# Allegro board PRISON_GOD_SCH_V220_VIAS_REPLACE.brd
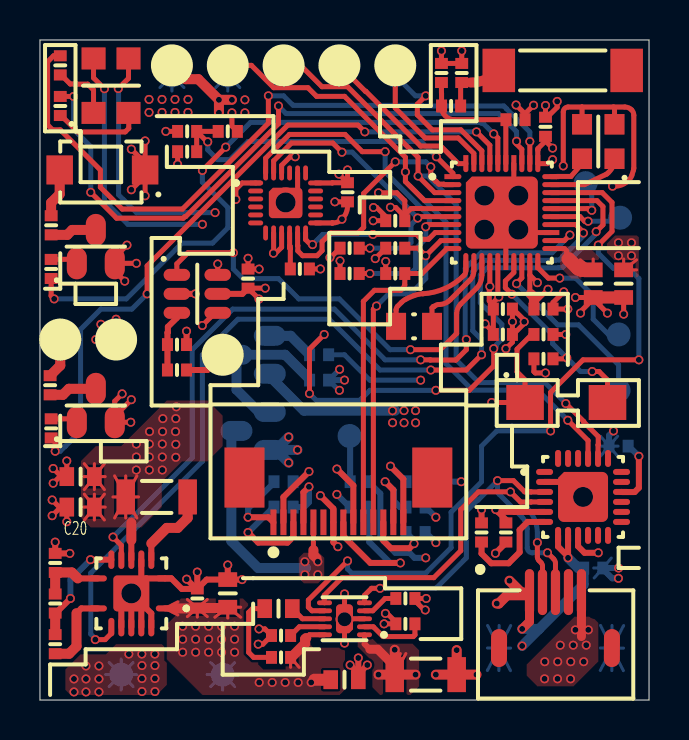
[diagram p0: board, top side]
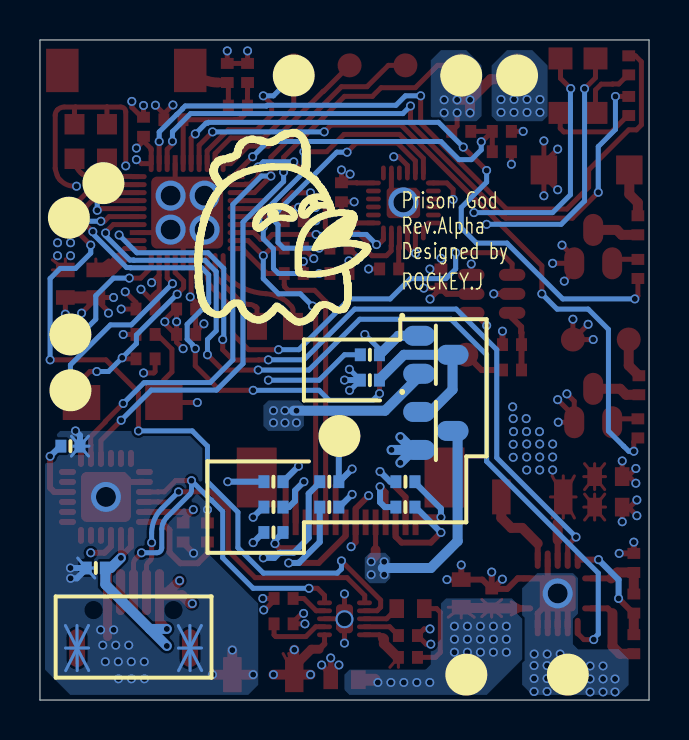
[diagram p1: board, bottom side, seen from below]

Outline 30.48 x 33.02 mm; copper layers: TOP, POWER SOURCE, GND, BOTTOM. Coordinates in mm from the lower left corner of the outline.
Outline path: 0,33.02 30.48,33.02 30.48,0 0,0 0,33.02

## Design rules (mm)
constraint set DEFAULT: min track width 0.152

## Placement (name value [footprint] x y rotation side)
ANT  ANTENNA  [ANT700X200-2N]  26.16 31.5 0 top
BAT+  BAT+  [TESTPOINT120]  9.14 1.27 180 bottom
BAT-  BAT-  [TESTPOINT120]  4.06 1.27 180 bottom
C1  100n  [RESC_0402]  7.37 28.45 0 top
C2  2.2p  [RESC_0402]  20.57 29.72 180 top
C3  100n  [RESC_0402]  25.3 28.68 90 top
C4  1.0u  [RESC_0603]  29.21 20.83 90 top
C5  1.0u  [RESC_0402]  25.2 19.56 180 top
C6  100n  [RESC_0402]  25.2 18.29 0 top
C7  1.0u  [RESC_0402]  23.16 19.56 0 top
C8  100n  [RESC_0402]  23.16 18.29 0 top
C9  100n  [RESC_0402]  17.78 23.98 180 top
C10  0-75p  [RESC_0402]  6.86 17.78 0 top
C11  100n  [RESC_0402]  10.41 21.08 270 top
C12  1u  [RESC_0402]  12.19 10.92 180 bottom
C13  4.7u  [RESC_0402]  18.8 10.92 180 bottom
C14  1u  [RESC_0402]  12.19 9.65 180 bottom
C15  2.2u  [RESC_0402]  18.8 9.65 180 bottom
C16  4.7u  [RESC_0402]  16 9.65 180 bottom
C17  1u  [RESC_0603]  15.24 1.02 0 top
C18  4.7u  [RESC_0603]  9.4 5.33 90 top
C19  0.1u  [RESC_0402]  7.87 5.08 90 top
C20  10u  [RESC_0603]  2.03 9.65 0 top
C21  10u  [RESC_0603]  2.03 11.18 0 top
C22  100n  [RESC_0402]  13 21.56 0 top
C23  10UF  [RESC_1206]  19.3 1.27 180 top
C24  4.7u  [RESC_0402]  28.96 12.7 0 bottom
C25  100n  [RESC_0402]  23.32 8.38 90 top
C26  100n  [RESC_0402]  22.1 8.38 270 top
C27  1.0u  [RESC_0402]  27.69 6.6 180 bottom
C28  100n  [RESC_0402]  15.39 25.4 270 top
CHR_LED  LED  [RESC_0603]  11.94 4.57 180 top
DA_RES  BUTTON  [BUTTON300X400X200-2N]  26.34 14.88 0 top
INTA  INTA  [TESTPOINT120]  28.96 15.49 180 bottom
INTB  INTB  [TESTPOINT120]  28.96 18.29 180 bottom
INTC  INTC  [TESTPOINT120]  17.78 31.75 0 top
INTD  INTD  [TESTPOINT120]  14.99 31.75 0 top
J_GND  GND  [TESTPOINT120]  9.4 31.24 180 bottom
J_VCC  J_VCC  [TESTPOINT120]  6.6 31.24 180 bottom
L1  DNP  [RESC_0402]  21.11 31.37 90 top
L2  7.5n  [RESC_0402]  20.09 31.37 90 top
L3  3.9n  [RESC_0402]  23.8 29.03 0 top
L4  2.2u  [RESC_0603]  27.69 20.83 270 top
L5  4.7u  [RESC_1206]  5.84 10.16 180 top
LED  RED_GREEN  [RGB_COM_A_3528-4N]  3.56 30.73 90 top
NOREF  -  []  0 33.02 0 top
NOREF#2  -  []  30.48 0 90 top
PAD  PAD  [TESTPOINT120]  9.14 17.27 0 top
Q1  SI2302DS  [SOT95P237X112-3N]  2.79 22.68 90 top
Q2  SI2302DS  [SOT95P237X112-3N]  2.79 14.73 90 top
Q3  Si2301BDS  [SOT95P237X112-3N]  10.67 13.46 180 bottom
Q4  SI2302DS  [SOT95P237X112-3N]  10.67 17.27 180 bottom
R1  10k  [RESC_0402]  9.4 28.45 0 top
R2  10k  [RESC_0402]  7.37 27.43 0 top
R3  10k  [RESC_0402]  17.78 21.34 180 top
R4  10k  [RESC_0402]  17.78 22.61 180 top
R5  10k  [RESC_0402]  15.49 22.61 0 top
R6  10k  [RESC_0402]  15.49 21.34 0 top
R7  10k  [RESC_0402]  25.2 17.07 0 top
R8  100  [RESC_0402]  0.56 23.75 270 top
R9  100  [RESC_0402]  0.51 15.75 270 top
R10  100  [RESC_0402]  1.02 31.75 90 top
R11  100  [RESC_0402]  1.02 29.72 90 top
R12  100  [RESC_0402]  0.56 21.56 90 top
R13  100  [RESC_0402]  0.56 13.59 90 top
R14  1-10k  [RESC_0402]  6.86 16.51 180 top
R15  47k  [RESC_0402]  13.97 16 180 bottom
R16  47k  [RESC_0402]  13.97 17.27 180 bottom
R17  10k  [RESC_0402]  16 10.92 180 bottom
R18  560k  [RESC_0402]  18.8 8.38 180 bottom
R19  500  [RESC_0402]  18.29 3.81 0 top
R20  250  [RESC_0402]  18.29 5.08 0 top
R21  10k  [RESC_0402]  12.06 3.23 180 top
R22  1.5k  [RESC_0402]  12.06 2.13 0 top
R23  158k  [RESC_0402]  0.76 2.79 90 top
R24  90k  [RESC_0402]  0.76 6.86 90 top
R25  15k  [RESC_0402]  0.76 4.83 90 top
RES  RES  [TESTPOINT120]  15.49 13.21 180 bottom
RXD  RX  [TESTPOINT120]  9.4 31.75 0 top
SOUNDER  R  [DET402_450X300-2N]  3.12 26.52 180 top
SWCLK  SWCLK  [TESTPOINT120]  27.3 25.86 180 bottom
SWDIO  SWDIO  [TESTPOINT120]  29.03 24.13 180 bottom
TXD  TX  [TESTPOINT120]  12.19 31.75 0 top
U1  DA14583_QFN40  [QFN40P500X500X80-41N]  23.11 24.38 0 top
U2  ASC0111B  [SOT95P237X292-6N]  7.87 20.32 0 top
U3  OLED_DIS_64_32  [FPC14N_1280X670X200-16N]  11.68 8.89 180 top
U4  BQ24050  [SON40P200X200X80-11N]  15.24 4.06 180 top
U5  TPS62736_PVQFN14  [QFN14P350X350X80-15N]  4.57 5.33 180 top
U6  MPU9250  [QFN24P300X300X100-25N]  12.29 24.87 0 top
U7  CP2104_QFN24  [QFN24P400X400X80-25N]  27.18 10.16 0 top
U_GND  GND  [TESTPOINT120]  6.6 31.75 0 top
USB  MICRO USB  [MICROUSB]  22.1 0 0 top
VM+  VM+  [TESTPOINT120]  3.81 18.03 0 top
VM-  VM-  [TESTPOINT120]  1.02 18.03 0 top
VPP  VPP  [TESTPOINT120]  17.78 31.24 180 bottom
Y1  16MHZ  [OSCCC200X250X90-4N]  27.94 27.94 180 top
Y2  32KHZ  [OSCCC200X120X60-2N]  18.72 18.69 0 top

## Library data of the parts
ANT = ANTENNA_0
BAT+ BAT- INTA INTB INTC INTD J_GND J_VCC PAD RES RXD SWCLK SWDIO TXD U_GND VM+ VM- VPP = TEST POINT
C1-C22 C24-C28 = CAP NP
C23 = CAP
CHR_LED = LED
DA_RES = SW PUSHBUTTON
L1-L5 = INDUCTOR
LED = LED BI-COLOUR_0
Q1 Q2 Q4 = MOSFET_I_EN_GSD: room: motor
Q3 = Si2301BDS_0
R1-R25 SOUNDER = R
U1 = DA14583_QFN40
U2 = ASC0111B_0
U3 = OLED_DIS_64_0
U4 = BQ24050
U5 = TPS62736_PVQFN14_2
U6 = MPU9250_1
U7 = CP2104_QFN24_0
USB = MICROUSB_1
Y1 = CRYSTAL14
Y2 = CRYSTAL

## Footprints (pads in the part's own frame, mm; a bottom-side part is the same pattern mirrored in y, then rotated)
ANT700X200-2N
  rect 1.625x2.17 smd: 1(-3.2,0) 2(3.2,0)
BUTTON300X400X200-2N
  rect 1.875x1.75 smd: 1(-2.062,0) 2(2.062,0)
DET402_450X300-2N
  rect 1.325x1.45 smd: 1(-2.138,0) 2(2.138,0)
FPC14N_1280X670X200-16N
  rect 0.3x1.28 smd: 1(0,0) 2(-0.5,0) 3(-1,0) 4(-1.5,0) 5(-2,0) 6(-2.5,0) 7(-3,0) 8(-3.5,0) 9(-4,0) 10(-4.5,0) 11(-5,0) 12(-5.5,0) 13(-6,0) 14(-6.5,0)
  rect 2x3 smd: M1(-7.95,-2.24) M2(1.45,-2.24)
MICROUSB
  round 0 hole 0.6: (1.7,4.5) (5.7,4.5)
  oval 0.46x2.3 smd: 1(2.4,5.4) 2(3.05,5.4) 3(3.7,5.4) 4(4.35,5.4) 5(5,5.4)
  oval 1.9x0.8 smd rot 89.7: 6(6.525,2.6) 7(0.875,2.6)
OSCCC200X120X60-2N
  rect 1x1.35 smd: 1(-0.9,0) 2(0.9,0)
OSCCC200X250X90-4N
  rect 1x1.025 smd: 1(-0.812,0.863) 2(-0.812,-0.863) 3(0.812,-0.863) 4(0.812,0.863)
QFN14P350X350X80-15N
  oval 0.925x0.3 smd: 1(-1.688,0.75) 7(1.688,0.75) 8(1.688,-0.75) 14(-1.688,-0.75)
  oval 0.3x0.925 smd: 2(-1,1.688) 3(-0.5,1.688) 4(0,1.688) 5(0.5,1.688) 6(1,1.688) 9(1,-1.688) 10(0.5,-1.688) 11(0,-1.688) 12(-0.5,-1.688) 13(-1,-1.688)
  custom 1.8x1.8 smd: 15(0,0)
QFN24P300X300X100-25N
  oval 0.75x0.238 smd: 1(-1.5,1) 2(-1.5,0.6) 3(-1.5,0.2) 4(-1.5,-0.2) 5(-1.5,-0.6) 6(-1.5,-1) 13(1.5,-1) 14(1.5,-0.6) 15(1.5,-0.2) 16(1.5,0.2) 17(1.5,0.6) 18(1.5,1)
  oval 0.238x0.75 smd: 7(-1,-1.5) 8(-0.6,-1.5) 9(-0.2,-1.5) 10(0.2,-1.5) 11(0.6,-1.5) 12(1,-1.5) 19(1,1.5) 20(0.6,1.5) 21(0.2,1.5) 22(-0.2,1.5) 23(-0.6,1.5) 24(-1,1.5)
  custom 1.68x1.52 smd: 25(0,0)
QFN24P400X400X80-25N
  oval 0.85x0.3 smd: 1(-1.925,1.25) 2(-1.925,0.75) 3(-1.925,0.25) 4(-1.925,-0.25) 5(-1.925,-0.75) 6(-1.925,-1.25) 13(1.925,-1.25) 14(1.925,-0.75) 15(1.925,-0.25) 16(1.925,0.25) 17(1.925,0.75) 18(1.925,1.25)
  oval 0.3x0.85 smd: 7(-1.25,-1.925) 8(-0.75,-1.925) 9(-0.25,-1.925) 10(0.25,-1.925) 11(0.75,-1.925) 12(1.25,-1.925) 19(1.25,1.925) 20(0.75,1.925) 21(0.25,1.925) 22(-0.25,1.925) 23(-0.75,1.925) 24(-1.25,1.925)
  custom 2.5x2.5 smd: 25(0,0)
QFN40P500X500X80-41N
  custom 0.85x0.25 smd: 1(-2.45,1.8) 2(-2.45,1.4) 3(-2.45,1) 4(-2.45,0.6) 5(-2.45,0.2) 6(-2.45,-0.2) 7(-2.45,-0.6) 8(-2.45,-1) 9(-2.45,-1.4) 10(-2.45,-1.8) 21(2.45,-1.8) 22(2.45,-1.4) 23(2.45,-1) 24(2.45,-0.6) 25(2.45,-0.2) 26(2.45,0.2) 27(2.45,0.6) 28(2.45,1) 29(2.45,1.4) 30(2.45,1.8)
  custom 0.25x0.85 smd: 11(-1.8,-2.45) 12(-1.4,-2.45) 13(-1,-2.45) 14(-0.6,-2.45) 15(-0.2,-2.45) 16(0.2,-2.45) 17(0.6,-2.45) 18(1,-2.45) 19(1.4,-2.45) 20(1.8,-2.45) 31(1.8,2.45) 32(1.4,2.45) 33(1,2.45) 34(0.6,2.45) 35(0.2,2.45) 36(-0.2,2.45) 37(-0.6,2.45) 38(-1,2.45) 39(-1.4,2.45) 40(-1.8,2.45)
  custom 3.6x3.6 smd: 41(0,0)
RESC_0402
  rect 0.55x0.64 smd: 1(-0.477,0) 2(0.477,0)
RESC_0603
  rect 0.73x0.94 smd: 1(-0.69,0) 2(0.69,0)
RESC_1206
  rect 0.925x1.75 smd: 1(-1.55,0) 2(1.55,0)
RGB_COM_A_3528-4N
  rect 1.1x1.2 smd: 1(-1.363,0.875) 2(-1.363,-0.875) 3(1.363,-0.875) 4(1.363,0.875)
SON40P200X200X80-11N
  oval 0.75x0.24 smd: 1(-1,0.8) 2(-1,0.4) 3(-1,0) 4(-1,-0.4) 5(-1,-0.8) 6(1,-0.8) 7(1,-0.4) 8(1,0) 9(1,0.4) 10(1,0.8)
  custom 0.85x1.45 smd: 11(0,0)
SOT95P237X112-3N
  oval 1.6x1 smd: 1(-0.835,0.95) 2(-0.835,-0.95) 3(0.835,0)
SOT95P237X292-6N
  oval 1.325x0.6 smd: 1(-1.022,0.95) 2(-1.022,0) 3(-1.022,-0.95) 4(1.022,-0.95) 5(1.022,0) 6(1.022,0.95)
TESTPOINT120
  round 1.2 smd: 1(0,0)

## Nets
GND: BAT-.1 C1.1 C3.2 C4.2 C5.1 C6.2 C7.2 C8.2 C9.2 C10.2 C11.1 C13.1 C15.1 C16.2 C17.2 C18.2 C19.2 C20.1 C21.1 C22.2 C23.1 C24.1 C25.1 C26.1 C27.1 C28.1 J_GND.1 L1.2 L2.2 L3.2 Q1.2(S) Q2.2(S) Q4.2(S) R1.2 R7.1 R16.1 R18.1 R19.1 R20.2 R21.2 R24.2 U1.16 U1.23 U1.34 U1.41 U2.2 U2.4 U2.6 U3.7(VSS) U4.3(VSS) U4.11 U5.2 U5.3 U5.4 U5.5 U5.12(VSS) U5.14 U5.15 U6.18 U6.20 U6.25 U7.2 U7.25 U_GND.1 USB.5 USB.6 USB.7 Y1.2 Y1.3
VBAT: BAT+.1 C17.1 C18.1 C19.1 J_VCC.1 Q3.2(S) R2.1 R15.1 R22.2 SOUNDER.1 U4.10 U5.1 VM+.1
VBAT_AD: C1.2 R1.1 R2.2 U1.1
VBUS: C23.2 C27.2 U4.1 U7.7 U7.8 USB.1(VBUS)
VCC_3V: C6.1 C7.1 C8.1 C9.1 C11.2 C16.1 C20.2 C21.2 C25.2 C28.2 DA_RES.1 L5.2 LED.3 LED.4 R3.2 R4.2 R5.1 R6.1 R17.1 U1.5 U1.14 U1.15 U2.5(VDD) U3.8 U5.11 U6.1 U6.8(VDDIO) U6.9 U6.13 U6.22 U7.5 U7.9
VIN_OK: U1.22 U5.10
VIN_OK_SET: U1.24 U5.6
CHR_SET: U1.28 U4.7
D+: U4.5 U7.3 USB.3
D-: U4.6 U7.4 USB.2
DA_RST: DA_RES.2 R7.2 U1.17
I2C_SCL_1: R4.1 U1.9 U3.11
I2C_SCL_2: R5.2 U1.6 U6.23
I2C_SDA_1: R3.1 U1.10 U3.10
I2C_SDA_2: R6.2 U1.7 U6.24
INTA: INTA.1 U1.18
INTB: INTB.1 U1.20
INTC: INTC.1 U1.39
INTD: INTD.1 U1.40
LED1: R10.2 U1.32
LED2: R11.2 U1.33
MOTOR: R13.1 U1.37
MPU_FSYNC: U1.2 U6.11
MPU_INT: U1.8 U6.12
OLED_RES: R17.2 RES.1 U3.9
OLED_VBAT: Q3.3 U3.5
OLED_VBAT_SW: Q4.1 R16.2 U1.27
SOUNDER: R12.1 U1.36
SWCLK: SWCLK.1 U1.26
SWDIO: SWDIO.1 U1.25
TOUCH: U1.13 U2.1
UART_RX: RXD.1 U1.4 U7.21
UART_TX: TXD.1 U1.3 U7.20
VDCDC: C3.1 C4.1 C5.2 L4.2 U1.19 U1.31
VPP: U1.38 VPP.1
N650552: C2.2 L2.1 L3.1 U1.35
N650846: L4.1 U1.21
N657737: U1.11 Y2.1
N657743: U1.12(XTAL32KP) Y2.2
N658494: U1.29 Y1.1
N680797: ANT.1 C2.1 L1.1
N748992: R19.2 U4.2
N749044: R20.1 U4.4
N749072: R21.1 U4.9
N749104: CHR_LED.1(CATHODE) U4.8
N749108: CHR_LED.2 R22.1
N749358: L5.1 U5.13
N749416: R24.1 R25.2 U5.8
N749488: R23.2 R25.1 U5.9
N750591: C22.1 U6.10
N751124: R8.1 SOUNDER.2
N751136: R9.1 VM-.1
N751236: Q1.3 R8.2
N751248: Q2.3 R9.2
N751256: Q1.1 R12.2
N751260: Q2.1 R13.2
N752175: C12.2 U3.1
N752329: Q3.1 Q4.3 R15.2
N752341: C12.1 U3.2
N752385: C14.2 U3.3
N752391: C14.1 U3.4
N752429: R18.2 U3.12
N752435: C15.2 U3.13
N752441: C13.2 U3.14
N753230: LED.1 R10.1
N753234: LED.2(YG_C) R11.1
N753932: C24.2 U7.16(VPP)
N754493: C10.1 R14.2 U2.3
N766501: PAD.1 R14.1
N768010: C26.2 U7.6
N788503: U1.30 Y1.4
N7492626: R23.1 U5.7

Pads without a net: ANT 2; U3 6 M1 M2; U6 2 3 4 5 6 7 14 15 16 17 19 21; U7 1 10 11 12 13 14 15 17 18 19 22 23 24; USB 4

## Via types
v1: diameter 0.45, hole 0.3, TOP to BOTTOM, 295 vias
v2: diameter 1.5, hole 1, TOP to BOTTOM, 7 vias
v3: diameter 0.9, hole 0.7, TOP to BOTTOM, 1 via

## Routing (per net, layer and track width the routed paths; a pad name or vN(x,y) marks a point on that pad's centre or on a via; arc(x,y) is an arc through that point)
GND: length 159.6
  TOP w0.152: C4.2 29.86,21.52 ; C4.2 29.86,22.02 ; C4.2 29.21,22.06
  TOP w0.25: U4.3 15.27,4.06 v3(15.24,4.04) ; v1(4.24,20.95) 3.74,21.45 Q1.2 ; 28.7,29.67 29.26,29.67 arc(29.45,29.63) 29.61,29.52 arc(29.69,29.4) 29.72,29.26 29.72,26.61 arc(29.72,26.57) 29.71,26.53 29.62,26.24 arc(29.57,26.14) 29.5,26.05 29.44,25.98 arc(29.13,25.78) 28.76,25.7 v1(28.65,25.7) ; 28.7,29.67 28.75,29.62 Y1.2 ; 28.7,29.67 27.13,29.67 ; v1(23.32,17.58) 23.64,17.9 C8.2 ; 1.04,9.65 C20.1 v1(1.34,8.92) ; 1.04,9.65 v1(0.61,9.22) ; 1.04,9.65 0.97,9.65 v1(0.61,10.01) ; C6.2 v1(26.31,18.29) ; C8.2 23.68,18.29 24.23,18.84 v1(24.23,18.92) 24.23,19.01 23.68,19.56 C7.2 ; C8.2 23.62,18.27 ; C8.2 v1(23.64,18.92) C7.2 ; C8.2 23.62,18.31 ; v1(25.3,29.74) C3.2 25.38,29.15 25.88,29.65 v1(25.88,29.95) ; U6.25 12.89,25.47 U6.20 ; v1(26.19,26.72) 26.19,29.42 arc(26.26,29.59) 26.44,29.67 27.13,29.67 ; v1(4.11,15.32) 3.74,14.95 3.74,14.2 ; 24.28,29.32 v1(23.83,29.77) ; 24.28,29.32 L3.2 ; 24.28,29.32 24.28,29.33 v1(24.7,29.76) ; v1(20.09,32.47) L2.2 L1.2 v1(21.11,32.47) ; U2.6 v1(8.9,21.81) ; v1(8.12,18.74) 8.76,19.37 U2.4 ; 3.74,14.2 v1(4.57,15.03) ; 3.74,14.2 Q2.2 v1(4.54,13.9) ; v3(15.24,4.04) v1(15.24,5.31) ; v3(15.24,4.04) v1(15.24,2.85) ; C7.2 23.62,19.54 ; C7.2 23.62,19.58 ; U1.34 23.71,24.98 U1.41 23.31,24.18 ; 1.07,11.18 v1(0.66,11.58) ; 1.07,11.18 C21.1 v1(1.34,11.96) ; 1.07,11.18 0.99,11.18 v1(0.66,10.85) ; v1(10.92,2.79) 11.16,2.79 R21.2 11.26,3.56 v1(10.96,3.56) ; v1(16.68,23.98) C9.2 17.3,24.19 16.85,24.64 v1(16.69,24.64) ; v1(19.28,4.5) 19.23,4.5 18.77,4.97 R20.2 v1(19.33,5.08) ; C1.1 v1(6.3,28.45) ; R7.1 24.72,16.43 24.79,16.36 v1(25.3,16.36) ; v1(17.22,3.81) R19.1 17.81,3.9 17.37,4.33 v1(17.29,4.33) ; v1(10.97,21.56) C11.1 v1(10.41,22.1) ; U1.16 23.31,24.18 ; 23.31,24.18 24.11,23.38 U1.23 ; C28.1 14.63,25.88 14.62,25.87 U6.18 ; C28.1 v1(14.96,26.31) ; C28.1 v1(15.39,26.52) ; Q1.2 v1(4.83,21.85) ; Q1.2 3.74,22.15 v1(4.36,22.76) ; 9.88,28.49 R1.2 9.61,28.72 v1(9.61,29.38) ; Y1.3 27.13,29.67 27.13,29.67 ; v1(26.42,19.56) C5.1 25.67,19.88 v1(26.21,20.42) ; v1(14.03,21.56) C22.2
  TOP w0.3: C18.2 8.34,6.02 C19.2 ; C18.2 v1(10.11,6.02) ; C18.2 v1(9.4,6.76) ; U5.2 5.57,4.33 5.07,4.83 ; C25.1 23.32,7.87 v1(22.79,7.34) ; 15.93,1.34 v1(15.93,2.1) ; 15.93,1.34 v1(15.52,1.75) ; 15.93,1.34 15.93,1.3 ; U7.2 26.43,10.91 v2(27.18,10.16) ; C17.2 15.93,1.3 ; 15.93,1.3 v1(16.38,1.75) ; v1(1.49,7.34) R24.2 v1(0.76,7.9) ; C19.2 v1(7.87,6.4) ; C19.2 7.83,5.56 ; C26.1 v1(22.1,9.53) ; 7.83,5.56 v1(7.34,6.05) ; 7.83,5.56 7.1,5.56 6.57,6.08 U5.14 5.32,6.08 5.07,5.83 ; 5.07,5.83 v2(4.57,5.33) ; 5.07,5.83 U5.12 ; 5.07,4.83 v2(4.57,5.33) ; 5.07,4.83 U5.3 ; v2(4.57,5.33) 4.07,4.83 U5.5 ; v2(4.57,5.33) U5.4 ; U2.2 v1(7.77,20.32) ; v1(14.03,10.22) 14.68,9.57 U3.7 14.68,7.9 v1(14.91,7.67) ; C10.2 v1(7.34,18.45)
  TOP w0.45: 27.1,5.65 USB.5 27.1,3.18
  TOP w0.5: C23.1 v1(21.84,1.27) ; C23.1 v1(19.81,1.27) ; C23.1 v1(20.85,2.5) ; v1(8.96,30.03) 7.92,31.06 7.29,31.06 U_GND.1 ; v1(8.96,30.03) v1(9.61,30.03) ; v1(8.96,30.03) v1(8.96,29.38)
  BOTTOM w0.152: J_GND.1 10,30.64 ; J_GND.1 8.62,31.24 ; J_GND.1 10,31.84 ; J_GND.1 8.8,30.64 ; J_GND.1 10.18,31.24 ; J_GND.1 8.8,31.84 ; J_GND.1 9.4,30.46 ; J_GND.1 9.4,32.02 ; 28.05,3.73 28.62,2.6 ; 28.62,2.6 29.2,2.6 ; 28.62,2.6 28.04,1.47 ; 28.62,2.6 28.04,2.6 ; 28.62,2.6 28.63,3.73 ; 28.62,2.6 28.62,1.47 ; 28.62,2.6 29.2,1.47 ; 28.62,2.6 29.21,3.73 ; BAT-.1 4.66,0.67 ; BAT-.1 3.46,1.87 ; BAT-.1 4.06,0.49 ; BAT-.1 3.46,0.67 ; BAT-.1 4.84,1.27 ; BAT-.1 4.06,2.05 ; BAT-.1 3.29,1.27 ; BAT-.1 4.66,1.87 ; 28.05,12.2 C24.1 ; C24.1 28.05,13.2 ; C24.1 28.93,12.7 ; C24.1 28.91,12.2 ; C24.1 28.03,12.7 ; C24.1 28.91,13.2 ; USB.7 22.98,3.73 ; USB.7 22.97,1.47 ; USB.7 22.39,1.47 ; USB.7 22.4,3.73 ; USB.7 23.55,2.6 ; USB.7 22.39,2.6 ; USB.7 23.55,1.47 ; USB.7 23.56,3.73 ; 27.74,6.11 C27.1 ; C27.1 28.59,7.1 ; C27.1 28.59,6.11 ; C27.1 27.71,6.6
  BOTTOM w0.25: v1(19.05,16) 16.51,16 15.24,17.27 R16.1
  BOTTOM w0.3: C16.2 15.49,9.65 v1(14.86,10.29) ; v1(28.95,6.09) 28.63,6.09 28.16,6.56 C27.1 v1(28.96,6.6) ; R18.1 19.3,8.38 v1(19.81,7.87) ; v1(19.81,9.14) 19.3,9.65 C15.1 ; v1(28.7,13.46) 28.48,13.24 C24.1 28.48,12.65 ; C13.1 v1(21.08,10.92)
  BOTTOM w0.5: 11.5,16.07 11.5,16.18 ; 11.5,16.18 13.21,14.48 17.78,14.48 ; 11.5,16.18 Q4.2
  vias: v1(1.7,1.05) v1(1.7,0.4) v1(2.3,1.7) v1(2.3,1.05) v1(2.3,0.4) v1(2.95,1.7) v1(2.95,1.05) v1(2.95,0.4) v1(4.45,2.3) v1(5.1,2.3) v1(5.1,1.72) v1(5.1,1.07) v1(5.1,0.42) v1(5.75,2.3) v1(5.75,1.72) v1(5.75,1.07) v1(5.75,0.42) v1(10.26,30.03) v1(10.26,29.38) v1(17.64,14.47) v1(17.65,13.87) v1(18.22,14.48) v1(18.22,13.87) v1(18.8,14.48) v1(18.8,13.87) v1(25.26,1.92) v1(25.25,1.06) v1(25.91,1.92) v1(25.9,1.06) v1(26.04,2.74) v1(26.56,1.92) v1(26.55,1.06) v1(26.69,2.74) v1(26.79,3.51) v1(27.21,1.92) v1(27.34,2.74) v1(27.44,3.51) v1(28.95,22.88) v1(28.95,22.23) v1(29.6,22.88) v1(29.6,22.23) v2(12.29,24.89) v2(22.24,25.23) v2(22.24,23.53) v2(23.94,25.23) v2(23.94,23.53)
VBAT: length 44.2
  TOP w0.152: R22.2 12.97,2.63 ; R22.2 12.97,1.64 ; R22.2 12.54,1.64 ; U5.1 6.9,4.75 ; U5.1 6.9,4.26 ; U5.1 6.9,4.91 ; 7.38,5.03 C19.1 ; C19.1 7.38,4.6 ; C19.1 7.38,4.17 ; C19.1 8.37,4.17 ; C19.1 7.87,4.15 ; C19.1 8.37,5.03 ; 9.4,4.1 C18.1 ; C18.1 10.05,4.14 ; C18.1 8.75,4.64 ; C18.1 10.05,4.64 ; C18.1 8.75,4.14
  TOP w0.25: 5.26,26.87 SOUNDER.1 5.26,26.22 ; 5.26,26.87 v1(5.26,27.97) ; 5.26,26.87 v1(4.57,27.56) ; v1(2.79,18.03) VM+.1 ; VM+.1 v1(3.05,18.8) ; VM+.1 v1(3.81,19.05) ; R2.1 v1(6.89,26.8) ; 5.26,26.22 v1(4.57,25.53) ; 5.26,26.22 v1(5.26,25.23) ; U4.10 13.49,3.26 13.32,3.1
  TOP w0.3: 6.85,4.58 U5.1
  TOP w0.5: C18.1 9.36,4.6 C19.1 7.86,4.58 6.85,4.58 ; R22.2 12.58,2.13 13.27,2.83 13.27,3.05 13.32,3.1
  TOP w0.6: C17.1 13.74,1.02
  BOTTOM w0.152: 5.83,31.24 J_VCC.1 ; J_VCC.1 6,30.64 ; J_VCC.1 6.6,30.46 ; J_VCC.1 7.2,30.64 ; J_VCC.1 7.38,31.24 ; J_VCC.1 7.2,31.84 ; J_VCC.1 6,31.84 ; J_VCC.1 6.6,32.02 ; 8.37,1.27 BAT+.1 ; BAT+.1 9.92,1.27 ; BAT+.1 9.14,0.49 ; BAT+.1 8.54,0.67 ; BAT+.1 9.74,0.67 ; BAT+.1 8.54,1.87 ; BAT+.1 9.74,1.87 ; BAT+.1 9.14,2.05
  BOTTOM w0.25: R15.1 14.96,15.49 ; v1(15,16.54) 14.99,16.54 14.45,16
  BOTTOM w0.3: R15.1 14.45,16 v1(15.24,16) ; 14.96,15.49 v1(14.99,15.49)
  BOTTOM w0.5: 11.8,12.51 v1(12.45,11.87) ; 11.8,12.51 v1(12.89,12.51) ; 11.8,12.51 Q3.2 ; 11.8,12.51 v1(12.45,13.15)
  vias: v1(5.46,30.05) v1(5.46,29.4) v1(6.11,30.05) v1(6.11,29.4) v1(6.76,30.05) v1(6.76,29.4) v1(7.14,3.69) v1(7.14,3.04) v1(7.14,2.39) v1(7.41,30.05) v1(7.41,29.4) v1(7.79,3.69) v1(7.79,3.04) v1(7.79,2.39) v1(8.44,3.69) v1(8.44,3.04) v1(8.44,2.39) v1(9.09,3.69) v1(9.09,3.04) v1(9.09,2.39) v1(9.74,3.69) v1(9.74,3.04) v1(9.74,2.39) v1(10.97,0.88) v1(11.62,0.88) v1(12.27,0.88) v1(12.92,0.88) v1(13.57,0.88)
VBAT_AD: length 16.9
  TOP w0.25: U1.1 20.66,26.35 v1(19.84,27.18) ; R2.2 C1.2 ; C1.2 R1.1 ; C1.2 8.37,27.92 v1(8.4,27.92)
  BOTTOM w0.25: v1(8.4,27.92) 8.4,27.52 8.89,27.03 9.51,27.03 10.41,27.94 19.08,27.94 v1(19.84,27.18)
VBUS: length 23.5
  TOP w0.152: 17.2,2.32 C23.2 ; C23.2 18.31,2.32 ; C23.2 18.03,2.32
  TOP w0.25: U4.1 16.24,2.81
  TOP w0.3: U7.8 26.43,7.18 ; 26.43,7.18 v1(26.43,7.11) ; 26.43,7.18 25.93,7.68 U7.7 ; 16.24,2.81 16.51,2.54
  TOP w0.45: v1(24.13,3.56) 24.5,3.92 USB.1 ; USB.1 24.06,5.4 ; USB.1 24.34,5.24 ; 16.51,2.54 16.9,2.54 17.75,1.68
  TOP w0.5: C23.2 v1(16.94,1.27) ; C23.2 v1(17.75,2.51) ; C23.2 v1(18.8,1.27) ; 24.06,5.4 v1(23.5,5.97) ; 24.34,5.24 23.37,5.24 22.96,4.83 v1(22.86,4.83)
  BOTTOM w0.5: v1(24.13,2.7) 24.98,3.56 ; 24.98,3.56 27.21,5.78 C27.2 26.94,6.6 v1(26.43,7.11) ; 24.98,3.56 v1(24.13,3.56)
VCC_3V: length 97.3
  TOP w0.152: 2.18,11.18 C21.2 ; C21.2 2.72,10.53 ; C21.2 2.72,11.82 ; C21.2 3.27,11.18 ; C21.2 2.22,10.53 ; C21.2 3.23,11.82 ; C21.2 3.23,10.53 ; C21.2 2.22,11.82 ; C20.2 3.23,9 ; C20.2 2.72,9 ; C20.2 3.27,9.65 ; C20.2 2.72,10.3 ; C20.2 3.23,10.3 ; C20.2 2.18,9.65 ; C20.2 2.22,10.3 ; C20.2 2.22,9 ; 3.74,11.21 L5.2 ; L5.2 4.93,10.16 ; L5.2 4.85,9.11 ; L5.2 4.29,9.11 ; L5.2 3.74,9.11 ; L5.2 4.85,11.21 ; L5.2 4.29,11.21 ; L5.2 3.65,10.16
  TOP w0.25: R4.2 v1(16.78,22.08) ; U1.15 22.91,20.22 v1(22.96,20.17) 22.69,19.89 22.69,19.77 ; U6.9 12.09,22.65 11.8,22.35 v1(11.68,22.35) 11.69,22.36 U6.8 ; 22.69,19.77 C7.1 ; 22.69,19.77 22.48,19.97 22.48,20.66 v1(22.51,20.69) U1.14 ; C7.1 22.69,18.41 ; C7.1 22.67,19.58 ; 24.57,18.24 24.61,18.29 C6.1 ; 24.57,18.24 23.88,17.55 23.88,16.41 24.28,16.01 DA_RES.1 v1(22.61,14.88) ; 24.57,18.24 24.57,18.29 ; v1(14.51,22.13) 14.54,22.13 R5.1 ; R3.2 v1(17.3,21.94) ; R6.1 v1(15.02,21.97) ; LED.3 4.43,31.1 v1(3.92,30.59) ; LED.4 2.68,31.13 v1(3.23,30.58) ; U1.5 19.11,24.58 19.1,24.59 18.71,24.59 18.7,24.58 18.57,24.58 18.32,24.33 18.32,24.22 18.26,24.17 ; v1(17.54,24.65) 17.55,24.64 17.81,24.64 18.18,24.26 18.26,24.26 ; 18.26,24.26 18.26,24.17 ; 18.26,24.26 18.26,24.97 17.86,25.37 v1(16.94,25.37) ; 18.26,24.17 C9.1 ; 22.69,18.41 C8.1 ; 22.69,18.41 v1(22.28,18.82) ; U6.13 14.66,23.87 arc(14.91,23.92) v1(15.11,24.05) arc(15.32,24.36) 15.39,24.73 C28.2 v1(14.76,24.92) ; v1(10.96,20.06) 10.62,20.4 10.62,20.44 10.46,20.6 ; 10.46,20.6 v1(11.27,20.6) ; 10.46,20.6 C11.2 ; U6.22 12.09,26.75 12.52,27.18 v1(12.78,27.18) ; v1(9.8,25.04) 9.8,25.55 10.12,25.87 U6.1 11,25.87
  TOP w0.3: 22.92,9.41 v1(22.81,9.53) ; 22.92,9.41 23.75,9.41 23.75,9.41 U7.5 ; 22.92,9.41 23.32,9.02 C25.2 ; U7.9 26.93,7.69 27.25,7.37 v1(27.94,7.37) ; C11.2 10.13,20.32 U2.5 ; v1(18.03,6.86) 16.53,6.86 15.18,8.21 U3.8 ; 4.57,8 U5.11
  TOP w0.5: 4.57,8.86 4.57,8
  BOTTOM w0.25: v1(3.23,30.58) 3.23,24.97 4.4,23.8 v1(8.13,23.8) ; v1(8.76,24.38) 4.83,24.38 3.93,25.28 3.93,30.58 v1(3.92,30.59)
  BOTTOM w0.3: v1(19.3,7.11) 18.74,7.11 18.5,7.36 18.45,7.36 18.44,7.37 17.78,7.37 17.03,8.11 17.03,10.32 16.48,10.88 R17.1 ; v1(18.03,6.86) 17.53,6.86 17.51,6.88 17.5,6.88 16.48,7.9 C16.1
  vias: v1(4.82,12.81) v1(4.82,12.16) v1(4.82,11.51) v1(5.48,13.43) v1(5.47,12.81) v1(5.47,12.16) v1(5.47,11.51) v1(6.15,14.08) v1(6.13,13.43) v1(6.12,12.81) v1(6.12,12.16) v1(6.12,11.51) v1(6.82,14.67) v1(6.8,14.08) v1(6.78,13.43) v1(6.8,12.79) v1(6.8,12.14)
VIN_OK: length 39.2
  TOP w0.25: v1(19.05,17.02) 19.53,17.02 19.54,17.01 20.8,17.01 20.81,17.02 20.83,17.02 21.34,17.53 v1(21.34,18.03) ; v1(26.52,23.26) 26.24,22.98 U1.22 ; U5.10 4.07,7.74 v1(3.65,8.15)
  BOTTOM w0.25: v1(26.52,23.26) 25.63,22.37 22.07,22.37 21.28,21.59 21.28,18.18 21.34,18.13 v1(21.34,18.03) ; v1(3.65,8.15) 7.62,12.12 7.62,17.53 9.65,19.56 14.73,19.56 17.27,17.02 v1(19.05,17.02)
VIN_OK_SET: length 46.6
  TOP w0.25: v1(27.2,23.36) 27.17,23.39 27.17,23.42 26.81,23.78 U1.24 ; v1(2.77,3.02) 3.26,3.02 3.57,3.33 U5.6 ; v1(19.56,16.51) 21.34,16.51 v1(22.1,17.27)
  BOTTOM w0.25: v1(22.1,17.27) 22.1,18.03 21.66,18.47 21.66,21.43 22.23,22 25.79,22 25.8,22.01 25.99,22.01 27.2,23.22 v1(27.2,23.36) ; v1(2.77,3.02) 2.77,3.07 2.54,3.3 2.54,6.35 8.13,11.94 8.13,17.27 9.91,19.05 14.48,19.05 17.02,16.51 v1(19.56,16.51)
CHR_SET: length 39.4
  TOP w0.25: v1(29.97,17.02) 27.18,17.02 25.55,15.39 v1(25.55,13.46) ; U1.28 28.13,25.38 28.63,24.89 28.63,23.44 v1(27.94,22.76) ; U4.7 13.61,4.46 13.43,4.65 13.43,5 v1(15.39,6.96)
  BOTTOM w0.25: v1(25.55,13.46) 22.86,13.46 22.1,12.7 22.1,10.92 20.57,9.4 20.57,7.62 19.3,6.35 15.6,6.35 15.39,6.56 v1(15.39,6.96) ; v1(27.94,22.76) 27.94,22.35 28.7,21.59 29.47,21.59 29.97,21.09 v1(29.97,17.02)
D+: length 20.6
  TOP w0.25: USB.3 25.8,6.84 arc(25.77,6.96) 25.7,7.06 v1(25.4,7.37) ; U7.3 24.58,10.41 24.57,10.41 24.26,10.41 23.7,10.97 v1(22.9,10.97) ; v1(17.02,5.59) 16.59,5.59 16.24,5.24 U4.5
  BOTTOM w0.25: v1(25.4,7.37) 24.63,7.37 arc(24.46,7.44) 24.38,7.62 24.38,8.56 arc(24.37,8.68) 24.34,8.8 arc(24.31,8.87) 24.28,8.93 arc(24.22,9.04) 24.14,9.14 22.98,10.29 arc(22.92,10.38) 22.9,10.5 v1(22.9,10.97) 21.93,10 21.9,10 21.34,9.44 21.34,7.11 19.81,5.59 v1(17.02,5.59)
D-: length 20.5
  TOP w0.25: v1(24.89,7.87) 24.89,7.16 arc(24.91,7.07) 24.97,6.98 25.07,6.88 arc(25.13,6.79) 25.15,6.7 USB.2 ; U4.6 14.23,4.88 14.23,5.24 15.11,6.12 19.71,6.12 21.06,7.47 21.06,9.53 21.95,10.41 v1(23.55,10.41) 24.05,9.91 24.57,9.91 24.58,9.91 U7.4
  BOTTOM w0.25: v1(23.55,10.41) 24.38,9.57 arc(24.76,9.01) 24.89,8.35 v1(24.89,7.87)
DA_RST: length 10.6
  TOP w0.25: R7.2 26.31,17.07 v1(26.37,17.12) ; v1(23.61,20.3) 23.29,20.62 23.29,20.96 23.71,21.39 U1.17 ; DA_RES.2 28.4,16.01 27.98,16.43 v1(27.64,16.43)
  BOTTOM w0.25: v1(27.64,16.43) 27.05,16.43 v1(26.37,17.12) 25.65,17.83 25.65,18.26 v1(23.61,20.3)
I2C_SCL_1: length 17.9
  TOP w0.25: v1(16.84,19.71) 16.68,19.55 U3.11 ; U1.9 20.06,22.98 v1(19.3,22.23) 18.92,22.61 R4.1
  BOTTOM w0.25: v1(16.84,19.71) 17.45,20.32 18.54,20.32 19.3,21.08 v1(19.3,22.23)
I2C_SCL_2: length 15.6
  TOP w0.25: v1(15.11,27.41) 14.66,27.86 12.58,27.86 11.69,26.97 U6.23 ; U1.6 18.98,24.18 v1(18.91,24.11) ; v1(16.51,22.61) R5.2
  BOTTOM w0.25: v1(15.11,27.41) 15.63,27.41 18.55,24.49 18.55,24.47 v1(18.91,24.11) 18.57,23.77 18.57,22.89 18.29,22.61 v1(16.51,22.61)
I2C_SDA_1: length 17
  TOP w0.25: U3.10 16.18,19.94 16.74,20.5 18.06,20.5 18.24,20.68 18.24,20.74 18.26,20.76 R3.1 19.12,21.34 20.36,22.58 U1.10
I2C_SDA_2: length 19
  TOP w0.25: v1(16.51,21.34) R6.2 ; U1.7 19.42,23.78 v1(19.3,23.67) ; U6.24 11.29,27.11 12.48,28.3 15.27,28.3 16.13,27.43 v1(17.27,27.43)
  BOTTOM w0.25: v1(17.27,27.43) 17.27,26.42 19.08,24.61 19.08,24.61 19.48,24.21 19.48,23.85 v1(19.3,23.67) 19.3,23.08 18.8,22.57 18.8,21.59 18.55,21.34 v1(16.51,21.34)
INTA: length 9.3
  TOP w0.25: v1(23.85,20.83) 23.85,20.85 24.11,21.12 U1.18
  BOTTOM w0.25: INTA.1 28.96,16.76 26.95,18.77 25.91,18.77 v1(23.85,20.83)
INTB: length 6.7
  TOP w0.25: U1.20 24.91,21.63 25.44,21.11 v1(26.01,21.11)
  BOTTOM w0.25: 29.21,18.29 INTB.1 28.45,18.29 27.69,19.05 27.69,20.22 26.8,21.11 v1(26.01,21.11)
INTC: length 7.5
  TOP w0.25: INTC.1 17.78,29.62 19.28,28.12 20.94,28.12 21.71,27.34 U1.39
INTD: length 8.4
  TOP w0.25: INTD.1 16.28,30.45 16.31,30.45 19.05,27.71 20.06,27.71 20.94,26.83 U1.40
LED1: length 35.8
  TOP w0.25: R10.2 0.68,32.23 0.38,31.93 0.38,28.77 0.63,28.52 1.02,28.52 3.02,26.52 3.02,25.65 4.11,24.56 7.13,24.56 11.43,28.86 v1(11.43,30.23) ; v1(24.51,27.94) U1.32
  BOTTOM w0.25: v1(11.43,30.23) 12.19,30.23 12.67,29.75 19.1,29.75 19.14,29.72 23.21,29.72 23.35,29.58 23.35,29.57 23.63,29.29 23.64,29.29 24.51,28.42 v1(24.51,27.94)
LED2: length 32.7
  TOP w0.25: U1.33 24.11,27.55 23.85,27.81 v1(23.85,27.95) ; R11.2 v1(1.68,30.2) ; v1(11.94,29.72) 11.94,28.83 7.29,24.18 7.25,24.18 7.17,24.1 3.84,24.1 v1(2.54,25.4)
  BOTTOM w0.25: v1(11.94,29.72) 12.32,29.34 22.94,29.34 23.82,28.47 arc(23.83,28.45) 23.84,28.43 arc(23.85,28.43) 23.85,28.43 v1(23.85,27.95) ; v1(1.68,30.2) 1.68,28.54 2.54,27.69 v1(2.54,25.4)
MOTOR: length 34.4
  TOP w0.25: v1(16.26,28.42) 15.92,28.76 12.4,28.76 5.36,21.72 v1(5.36,20.32) ; U1.37 22.51,27.75 v1(21.84,28.42) ; R13.1 0.76,12.91 v1(0.76,12.45)
  BOTTOM w0.25: v1(5.36,20.32) 4.6,19.56 3.05,19.56 2.03,18.54 2.03,13.46 1.27,12.7 1.27,12.7 1.02,12.45 v1(0.76,12.45) ; v1(21.84,28.42) v1(16.26,28.42)
MPU_FSYNC: length 12.7
  TOP w0.25: U6.11 12.89,22.74 12.9,22.73 12.9,22.47 13.14,22.23 13.87,22.23 14.12,22.48 14.12,22.93 14.56,23.37 15.92,23.37 16.2,23.64 16.2,25.34 v1(17.78,26.92) ; v1(19.56,26.67) 19.56,26.19 19.8,25.95 19.82,25.95 19.96,25.81 20.21,25.81 20.23,25.78 U1.2
  BOTTOM w0.25: v1(19.56,26.67) 19.3,26.92 v1(17.78,26.92)
MPU_INT: length 8.3
  TOP w0.25: U6.12 13.29,23.03 13.54,22.78 v1(13.64,22.78) ; v1(16.66,23.29) 18.85,23.29 19.09,23.05 19.44,23.05 19.78,23.38 U1.8
  BOTTOM w0.25: v1(13.64,22.78) 14.15,23.29 v1(16.66,23.29)
OLED_RES: length 6.2
  TOP w0.3: U3.9 15.68,10.73 v1(14.86,11.56)
  BOTTOM w0.3: 15.52,10.97 15.45,10.97 v1(14.86,11.56) ; 15.52,10.97 15.52,13.13 RES.1 ; 15.52,10.97 R17.2
OLED_VBAT: length 11.8
  TOP w0.25: 13.68,7.5 U3.5
  TOP w0.5: 13.68,7.5 13.68,7.25 13.84,7.09
  BOTTOM w0.25: 13.32,6.6 13.34,6.59
  BOTTOM w0.5: 13.32,6.6 10.92,6.6 9.58,7.95 9.58,13.21 Q3.3
  vias: v1(13.26,6.92) v1(13.26,6.27) v1(13.91,6.92) v1(13.91,6.27)
OLED_VBAT_SW: length 33.1
  TOP w0.25: v1(27.84,23.43) 28.17,23.77 28.17,24.68 27.87,24.98 U1.27 ; v1(22.71,17.58) 22.71,16.72 21.48,15.49 v1(19.81,15.49) ; v1(13.49,15.33) 13.49,17.55 v1(14.22,18.29)
  BOTTOM w0.25: v1(27.84,23.43) 27.84,23.33 26.14,21.64 25.96,21.64 25.94,21.62 22.38,21.62 22.04,21.27 22.04,19.87 23.11,18.8 23.11,18.05 22.84,17.77 22.84,17.71 v1(22.71,17.58) ; v1(14.22,18.29) 13.49,17.56 R16.2 ; v1(19.81,15.49) 16.51,15.49 16.01,14.99 13.82,14.99 v1(13.49,15.33)
  BOTTOM w0.5: Q4.1 12.54,18.22 R16.2
SOUNDER: length 32
  TOP w0.25: v1(22.71,28.32) 22.91,28.11 U1.36 ; R12.1 0.56,20.22 v1(0.71,20.07) ; v1(8.13,26.49) v1(9.3,27.66)
  BOTTOM w0.25: v1(22.71,28.32) 22.17,28.86 22.08,28.86 22.04,28.9 10.54,28.9 v1(9.3,27.66) ; v1(0.71,20.07) 4.32,20.07 7.11,22.86 8.64,22.86 9.4,23.62 9.4,24.64 8.13,25.91 v1(8.13,26.49)
SWCLK: length 3.6
  TOP w0.25: U1.26 27.41,24.58 27.49,24.5 v1(27.61,24.5)
  BOTTOM w0.25: v1(27.61,24.5) 27.61,25.55 SWCLK.1
SWDIO: length 3.6
  TOP w0.25: U1.25 27.02,24.18 27.25,23.95 v1(27.43,23.95)
  BOTTOM w0.25: v1(27.43,23.95) 28.85,23.95 SWDIO.1
TOUCH: length 21.7
  TOP w0.25: v1(9.68,22.38) 7.41,22.38 6.85,21.82 U2.1 ; U1.13 22.11,21.26 arc(22.04,20.9) 21.84,20.6 21.05,19.81 arc(20.9,19.59) 20.85,19.33 20.85,18.34 20.04,17.53 v1(18.54,17.53)
  BOTTOM w0.25: v1(18.54,17.53) 17.53,17.53 14.99,20.07 12.95,20.07 11.94,21.08 10.16,21.08 9.68,21.56 v1(9.68,22.38)
UART_RX: length 34.8
  TOP w0.25: U7.21 27.43,12.98 v1(26.42,14) ; RXD.1 10.58,31.75 11.7,30.63 13.41,30.63 13.84,30.2 15.24,30.2 18.29,27.15 v1(18.29,26.42) 18.29,25.94 19.24,24.98 U1.4
  BOTTOM w0.25: v1(18.29,26.42) 18.29,25.94 20.32,23.91 20.32,16.83 21.64,15.5 24.91,15.5 v1(26.42,14)
UART_TX: length 31.7
  TOP w0.25: TXD.1 13.04,31.75 14.11,30.68 15.39,30.68 18.92,27.15 v1(18.92,26.21) 19.75,25.38 U1.3 ; U7.20 27.93,12.76 27.94,12.77 27.94,13.18 27.21,13.9 27.21,13.94 v1(26.31,14.83)
  BOTTOM w0.25: v1(18.92,26.21) 19.4,26.21 20.83,24.78 20.83,17.02 21.97,15.88 25.15,15.88 25.15,15.87 25.28,15.87 v1(26.31,14.83)
VDCDC: length 12.2
  TOP w0.25: C3.1 25.3,27.97 ; 25.3,27.97 v1(25.65,27.61) ; 25.3,27.97 24.92,27.58 24.92,27.51 24.91,27.51 U1.31 25.4,26.83 25.6,27.03 v1(25.65,27.03) ; 24.51,21.26 24.51,20.36 24.57,20.3 ; 24.51,21.26 v1(24.89,20.88) ; 24.51,21.26 U1.19 ; v1(27.05,19.35) 27.05,19.43 27.69,20.07 L4.2 v1(26.8,20.14) ; C4.1 v1(29.21,19.3) ; v1(28.4,19.35) 27.79,19.96 27.79,20.14 ; 24.72,19.84 v1(25.43,20.55)
  TOP w0.5: 24.57,20.3 24.72,20.15 C5.2
  TOP w0.6: L4.2 C4.1
VPP: length 7.7
  TOP w0.25: v1(19.3,30.23) 18.88,29.81 18.88,29.27 19.63,28.52 21.06,28.52 22.11,27.47 U1.38
  BOTTOM w0.25: VPP.1 18.8,30.23 v1(19.3,30.23)
N650552: length 7
  TOP w0.25: U1.35 23.31,29.01 L3.1 20.74,29.03 arc(20.28,29.22) 20.1,29.67 C2.2 20.1,30.36 20.09,30.36 L2.1
N650846: length 4.8
  TOP w0.152: L4.1 27.69,22.06 ; L4.1 27.04,21.27 ; L4.1 27.04,22.02
  TOP w0.25: U1.21 26.24,22.58 26.36,22.47 26.36,22.29 arc(26.38,22.16) 26.45,22.06
  TOP w0.7: L4.1 27.13,21.52 arc(27.01,21.54) 26.9,21.61 26.45,22.06
N657737: length 5.5
  TOP w0.25: Y2.1 17.82,19.52 arc(17.84,19.61) 17.89,19.69 18.1,19.9 arc(18.2,19.98) 18.3,20.05 arc(18.51,20.15) 18.72,20.23 arc(18.94,20.29) 19.17,20.32 arc(20.28,20.59) 21.22,21.24 arc(21.29,21.35) 21.31,21.48 U1.11
N657743: length 4.3
  TOP w0.25: U1.12 21.71,21.46 arc(21.67,21.23) 21.53,21.03 20.53,20.02 arc(20.27,19.85) 19.96,19.79 arc(19.84,19.76) 19.73,19.69 19.69,19.69 19.62,19.62 Y2.2
N658494: length 3.8
  TOP w0.25: U1.29 27.25,25.78 28.36,26.31 28.43,26.37 arc(28.67,26.69) Y1.1
N680797: length 3.2
  TOP w0.25: C2.1 21.05,30.76 arc(21.07,30.83) L1.1 21.56,30.89
  TOP w0.5: ANT.1 22.92,31.45 arc(22.3,31.04) 21.56,30.89
N748992: length 3.3
  TOP w0.25: R19.2 18.77,3.26 18.68,3.17 17.17,3.17 16.68,3.66 U4.2
N749044: length 1.8
  TOP w0.25: R20.1 17.27,5.08 16.66,4.46 U4.4
N749072: length 1.9
  TOP w0.25: U4.9 12.98,3.66 R21.1
N749104: length 1.8
  TOP w0.25: U4.8 13.14,4.06 CHR_LED.1
N749108: length 4.1
  TOP w0.25: CHR_LED.2 10.63,4.57 10.45,4.39 10.45,2.38 10.7,2.13 R22.1
N749358: length 4.2
  TOP w0.3: 5.57,7.83 U5.13
  TOP w0.5: 5.57,7.83 6.35,8.61 6.89,8.61 7.39,9.11 L5.1
N749416: length 3.3
  TOP w0.3: 1.89,6.08 U5.8
  TOP w0.5: R25.2 R24.1 1.6,6.38 1.89,6.08
N749488: length 5.5
  TOP w0.3: U5.9 v1(2.53,7.02) ; R25.1 0.79,4.35 1.52,5.08 v1(1.52,5.08)
  TOP w0.5: R23.2 R25.1
  BOTTOM w0.3: v1(1.52,5.08) 1.52,6.02 v1(2.53,7.02)
N750591: length 2
  TOP w0.25: 12.53,22.58 C22.1 ; 12.53,22.58 12.49,22.62 12.49,22.73 ; 12.53,22.58 12.52,22.59 12.52,22.7 12.49,22.73 ; U6.10 12.49,22.73
N751124: length 2.5
  TOP w0.5: R8.1 0.56,24.88 0.99,25.31 SOUNDER.2
N751136: length 2
  TOP w0.5: R9.1 1.02,16.73 VM-.1
N751236: length 2.3
  TOP w0.5: Q1.3 1.61,23.52 1.37,23.27 R8.2
N751248: length 2.4
  TOP w0.5: R9.2 1.15,15.27 1.45,15.57 2.79,15.57 Q2.3
N751256: length 1.4
  TOP w0.25: Q1.1 1.64,22.05 0.56,22.05 R12.2
N751260: length 1.4
  TOP w0.25: Q2.1 1.67,14.07 R13.2
  TOP w0.3: 1.84,13.88 Q2.1
N752175: length 3.7
  TOP w0.3: U3.1 11.43,9.14 v1(10.41,9.14)
  BOTTOM w0.3: v1(10.41,9.14) 10.41,9.58 11.71,10.88 C12.2
N752329: length 8.2
  BOTTOM w0.5: 11.64,14.41 Q3.1 10.95,14.41 9.83,15.53 Q4.3 12.27,17.27 13.49,16.05 R15.2
N752341: length 4.1
  TOP w0.3: U3.2 12.18,10.15 v1(13.46,11.43)
  BOTTOM w0.3: v1(13.46,11.43) 12.95,10.92 C12.1
N752385: length 5.2
  TOP w0.3: v1(10.41,8.38) 10.92,7.87 12.38,7.87 12.68,8.17 U3.3
  BOTTOM w0.3: v1(10.41,8.38) 11.68,9.65 C14.2 11.71,9.61
N752391: length 3.6
  TOP w0.3: v1(13.46,10.67) 13.18,10.39 U3.4
  BOTTOM w0.3: C14.1 13.22,9.65 13.46,9.89 v1(13.46,10.67)
N752429: length 3.4
  TOP w0.3: U3.12 17.18,7.97 17.56,7.59 18.49,7.59 v1(18.72,7.82)
  BOTTOM w0.3: v1(18.72,7.82) 18.72,7.98 R18.2
N752435: length 4.1
  TOP w0.3: v1(17.27,10.92) 17.68,10.51 U3.13
  BOTTOM w0.3: v1(17.27,10.92) 17.72,10.48 17.72,9.95 18.02,9.65 C15.2
N752441: length 4.2
  TOP w0.3: v1(17.54,11.7) 18.18,11.06 U3.14
  BOTTOM w0.3: v1(17.54,11.7) C13.2
N753230: length 3.1
  TOP w0.25: LED.1 2.68,30.52 2.39,30.81 1.83,30.81 1.82,30.82 1.51,30.82 1.06,31.27 R10.1
N753234: length 4.6
  TOP w0.25: R11.1 1.06,29.24 1.88,28.42 4.27,28.42 4.44,28.6 4.44,29.36 LED.2
N753932: length 3.3
  TOP w0.3: v1(29.97,12.19) 29.97,10.62 29.76,10.4 29.11,10.4 U7.16
  BOTTOM w0.3: v1(29.97,12.19) 29.46,12.7 C24.2
N754493: length 3.1
  TOP w0.3: U2.3 6.85,19.12 6.4,18.67 6.4,18.4 6.38,18.38 C10.1 R14.2
N766501: length 2.1
  TOP w0.3: R14.1 8.38,16.51 PAD.1
N768010: length 5.4
  TOP w0.3: U7.6 24.4,8.91 24,8.51 24,7.39 23.45,6.84 22.59,6.84 22.1,7.33 C26.2
N788503: length 2.1
  TOP w0.25: U1.30 25.84,26.18 25.85,26.19 26.57,26.19 27.13,26.84 Y1.4
N7492626: length 4
  TOP w0.3: U5.7 2.07,4.58 1.83,4.34
  TOP w0.5: R23.1 1.46,2.32 1.83,2.69 1.83,4.34

## Copper pours and planes (outline as drawn; the poured copper is in the pictures)
GND on TOP: 26.75,4.17 27.64,4.17 27.94,3.86 27.94,1.93 26.7,0.69 24.89,0.69 24.36,1.22 24.36,1.78
GND on TOP: 3.81,2.79 3.3,2.29 2.03,2.29 1.27,1.52 1.27,0.51 1.52,0.25 5.84,0.25 6.35,0.76 6.35,2.54 6.1,2.79
GND on TOP: 28.73,21.18 28.73,22.02 28.37,22.38 28.37,23.04 28.57,23.24 29.87,23.24 29.97,23.14 29.97,21.23 29.84,21.11 28.8,21.11
GND on BOTTOM: 3.81,2.79 3.56,2.54 1.52,2.54 1.02,2.03 1.02,0.76 1.52,0.25 5.84,0.25 6.35,0.76 6.35,5.59 5.59,6.35 3.81,6.35 3.56,6.1 3.56,4.32 3.81,4.06
GND on BOTTOM: 19.05,14.99 17.53,14.99 17.27,14.73 17.27,13.72 17.53,13.46 19.05,13.46 19.3,13.72 19.3,14.73
GND on BOTTOM: 9.14,32.51 8.38,31.75 8.38,29.21 8.64,28.96 10.67,28.96 10.92,29.21 10.92,32 10.41,32.51
GND on BOTTOM: 20.07,0.25 28.96,0.25 30.23,1.52 30.23,12.7 29.46,13.46 22.86,13.46 22.1,12.7 22.1,7.37 19.56,4.83 19.56,0.76
GND on GND: 1.52,0.25 1.02,0.76 1.02,4.57 0.25,5.33 0.25,32.26 0.76,32.77 4.06,32.77 4.32,32.51 4.32,31.5 5.59,30.23 10.67,30.23 10.92,29.97 10.92,29.21 6.86,25.15 5.84,25.15 5.08,24.38 5.08,13.46 3.05,11.43 3.05,9.14 3.56,8.64 6.6,11.68 6.6,22.86 12.7,28.96 18.29,28.96 19.3,29.97 19.3,32.51 19.56,32.77 21.59,32.77 21.84,32.51 21.84,30.48 22.1,30.23 29.72,30.23 30.23,29.72 30.23,14.73 29.84,14.22 23.11,14.22 22.86,14.48 21.59,15.75 18.8,15.75 16.76,17.78 16.76,18.8 11.18,18.8 9.91,17.53 9.91,10.92 7.87,8.89 8.13,8.64 12.45,8.64 16.76,12.95 16.76,14.73 17.02,14.99 19.81,14.99 20.32,14.48 20.32,13.72 20.57,13.46 29.21,13.46 29.97,12.7 29.97,1.27 28.96,0.25
VBAT on TOP: 13.51,2.82 13.64,2.64 13.82,2.62 15.01,2.62 15.27,2.49 15.27,0.53 14.99,0.25 12.5,0.25 12.29,0.46 12.29,2.18 13.03,2.92 13.03,3.05 13.08,3.2 13.21,3.33 13.39,3.33 13.44,3.38 13.64,3.38 13.67,3.25 13.56,3.17 13.59,3.07 13.51,2.95
VBAT on TOP: 7.06,5.08 6.83,4.85 6.83,4.27 6.35,3.78 6.35,2.03 8.13,0.25 14.99,0.25 15.24,0.51 15.21,1.55 15.01,1.75 14.84,1.81 14.15,1.8 14,1.73 13.89,1.52 11.18,1.52 10.92,1.78 10.92,2.54 10.41,3.05 10.41,4.83 10.16,5.08
VBAT on BOTTOM: 7.11,32.51 5.84,32.51 5.08,31.75 5.08,29.21 5.33,28.96 7.62,28.96 7.87,29.21 7.87,31.75
VBAT on BOTTOM: 6.86,5.08 6.6,4.83 6.6,4.32 6.35,4.06 6.35,2.03 8.13,0.25 14.99,0.25 15.24,0.51 15.24,1.27 14.99,1.52 11.18,1.52 10.92,1.78 10.92,2.54 10.41,3.05 10.41,4.83 10.16,5.08
VBAT on POWER SOURCE: 0.76,32.77 8.13,32.77 9.65,31.24 9.65,27.69 6.6,24.64 6.6,18.54 3.56,15.49 3.56,10.92 5.08,9.4 8.89,9.4 9.91,10.41 9.91,15.19 11.6,16.88 15.5,16.83 15.8,16.54 15.8,10.72 11.94,6.86 10.92,6.86 10.41,6.35 10.41,3.05 10.92,2.54 10.92,1.78 11.19,1.51 14.98,1.53 15.24,1.27 15.24,0.51 14.99,0.25 8.38,0.25 5.59,3.05 5.59,5.08 5.08,5.59 1.52,5.59 0.25,6.86 0.25,32.26
VBUS on TOP: 15.98,3.23 16.48,3.23 16.89,2.82 18.64,2.82 18.97,2.49 18.97,0.69 18.54,0.25 17.02,0.25 16.64,0.64 16.64,1.93 15.9,2.67 15.9,3.15
VBUS on POWER SOURCE: 16.64,2.51 16.89,2.82 18.11,2.82 20.5,5.21 22.15,5.21 23.44,6.5 24.43,6.5 24.71,6.22 24.71,2.51 22.45,0.25 17.02,0.25 16.64,0.64
VCC_3V on TOP: 2.79,12.7 2.06,11.96 2.06,9.12 2.54,8.64 5.08,8.64 6.1,9.65 6.1,10.92 7.11,11.94 8.38,11.94 9.14,12.7 9.14,14.22 8.38,14.99 6.35,14.99 4.06,12.7
VCC_3V on POWER SOURCE: 4.34,14.99 4.34,11.13 5.49,9.98 8.46,9.98 9.22,10.74 9.22,15.47 12.83,19.08 16.21,19.08 17.79,17.49 17.77,8.95 16.94,8.13 16.94,6.73 17.6,6.07 21.72,6.07 22.66,7.01 28.04,7.01 29.36,8.33 29.36,11.73 27.28,13.82 27.28,16.99 26.62,17.45 24.31,17.45 23.75,18.01 23.75,21.23 20.47,24.46 20.47,28.73 19.63,29.59 12.29,29.59 7.42,24.71 7.42,18.08 4.47,15.14
OLED_VBAT on TOP: 13.21,7.37 12.95,7.11 12.95,6.1 13.21,5.84 14,5.84 14.22,6.07 14.22,7.11 13.97,7.37
OLED_VBAT on BOTTOM: 13.97,7.37 13.21,7.37 12.95,7.11 12.95,6.1 13.21,5.84 13.97,5.84 14.22,6.1 14.22,7.11
VDCDC on POWER SOURCE: 29.21,29.46 22.1,29.46 21.34,28.7 21.34,24.64 24.38,21.59 24.38,18.54 24.94,18.06 29.72,18.03 30.23,18.54 30.23,28.45 ; 1 cut-out
N650846 on TOP: 27.43,22.71 26.26,22.71 26.04,22.48 26.04,21.64 26.59,21.08 28.12,21.08 28.24,21.21 28.24,21.89

## Text on the board
Ref Des/Silkscreen Bottom: Prison God | Rev.Alpha | Designed by | ROCKEY.J
